# Altium PCB JacdacBrainF4 41.PcbDoc (part 1 of 2)
Units mm, origin at the board's own origin, x right, y up, seen from the top; angles counter-clockwise.
Board outline 19 x 37.35 mm, 2 copper layers (Top Layer, Bottom Layer), stack 1.525 mm thick; 50 components, 34 nets, 190 pads, 37 vias.
Unrouted connection lines stored in the file: 48.
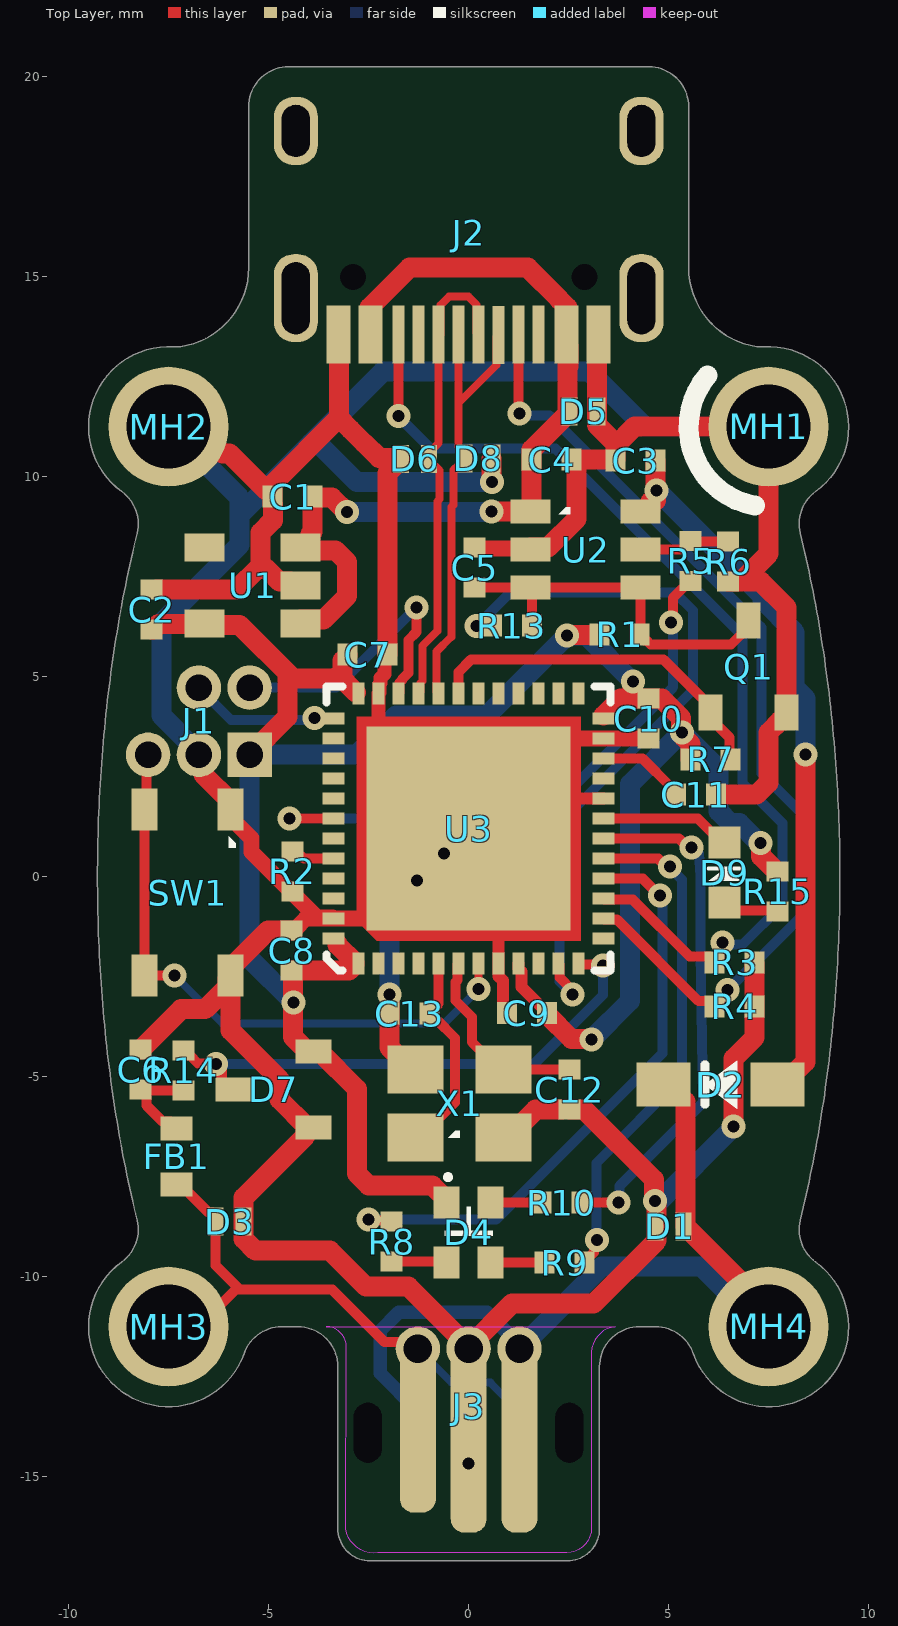
[diagram p0: Top Layer view]
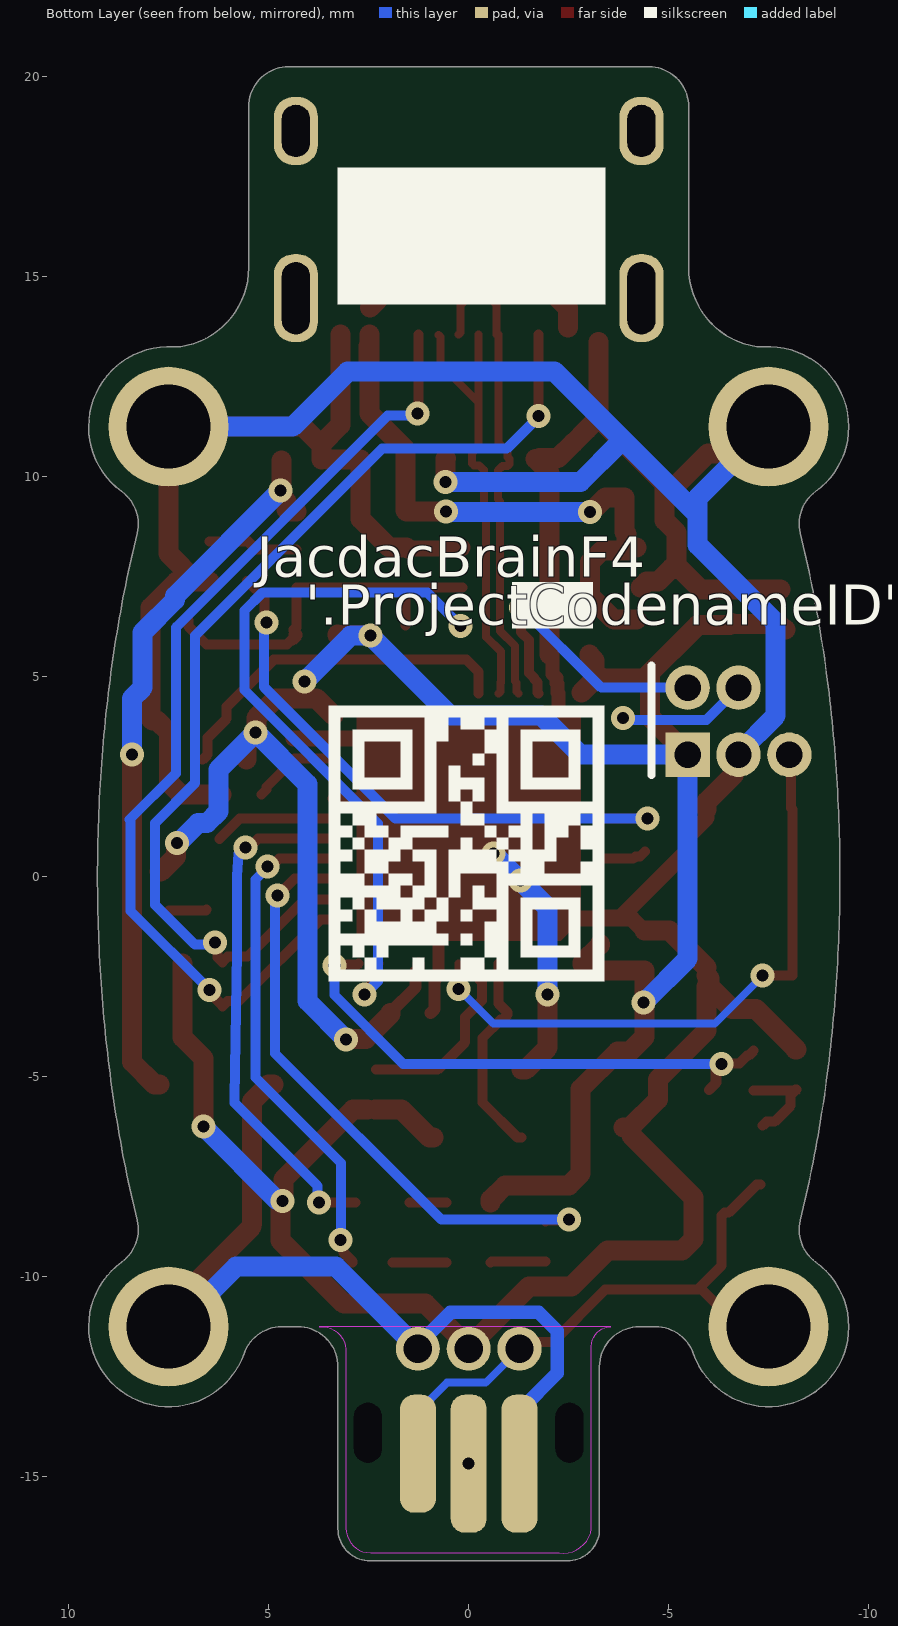
[diagram p1: Bottom Layer view, seen from below]

## Layer stack, top to bottom
Top Solder: solder mask 0.0102, Solder Resist, Dk 3.5
Top Layer: signal copper 0.0356
Dielectric 1: core 1.454, FR-4, Dk 4.2
Bottom Layer: signal copper 0.0356
Bottom Solder: solder mask 0.0102, Solder Resist, Dk 3.5

## Board outline
-9.493,-11.083 -9.493,-11.082 cw(c-7.5,-11.25) -8.675,-9.631 ccw(c-9.262,-8.822) -8.291,-8.584 -8.329,-8.425 -8.367,-8.265 -8.404,-8.104 -8.44,-7.942 -8.476,-7.78 -8.511,-7.617 -8.545,-7.453 -8.578,-7.289 -8.611,-7.124 -8.643,-6.959 -8.674,-6.793 -8.704,-6.626 -8.734,-6.459 -8.763,-6.291 -8.791,-6.122 -8.818,-5.953 -8.845,-5.784 -8.871,-5.614 -8.896,-5.444 -8.92,-5.273 -8.944,-5.101 -8.966,-4.929 -8.988,-4.757 -9.009,-4.585 -9.03,-4.411 -9.049,-4.238 -9.068,-4.064 -9.086,-3.89 -9.103,-3.716 -9.12,-3.541 -9.136,-3.366 -9.15,-3.19 -9.164,-3.014 -9.178,-2.839 -9.19,-2.662 -9.202,-2.486 -9.213,-2.309 -9.223,-2.132 -9.232,-1.955 -9.24,-1.778 -9.248,-1.601 -9.255,-1.423 -9.261,-1.246 -9.266,-1.068 -9.271,-0.89 -9.274,-0.712 -9.277,-0.534 -9.279,-0.356 -9.28,-0.178 -9.281,0 -9.28,0.178 -9.279,0.356 -9.277,0.534 -9.274,0.712 -9.271,0.89 -9.266,1.068 -9.261,1.246 -9.255,1.423 -9.248,1.601 -9.24,1.778 -9.232,1.955 -9.223,2.132 -9.213,2.309 -9.202,2.486 -9.19,2.662 -9.178,2.839 -9.164,3.014 -9.15,3.19 -9.136,3.366 -9.12,3.541 -9.103,3.716 -9.086,3.89 -9.068,4.064 -9.049,4.238 -9.03,4.411 -9.009,4.585 -8.988,4.757 -8.966,4.929 -8.944,5.101 -8.92,5.273 -8.896,5.444 -8.871,5.614 -8.845,5.784 -8.818,5.953 -8.791,6.122 -8.763,6.291 -8.734,6.459 -8.704,6.626 -8.674,6.793 -8.643,6.959 -8.611,7.124 -8.578,7.289 -8.545,7.453 -8.511,7.617 -8.476,7.78 -8.44,7.942 -8.404,8.104 -8.367,8.265 -8.329,8.425 -8.291,8.584 ccw(c-9.262,8.822) -8.675,9.631 cw(c-7.5,11.25) -7.375,13.246 ccw(c-7.312,14.245) -7.204,13.25 ccw(c-7.5,15.228) -5.5,15.228 -5.5,19.25 cw(c-4.5,19.25) -4.5,20.25 4.5,20.25 cw(c4.5,19.25) 5.5,19.25 5.5,15.228 ccw(c7.5,15.228) 7.204,13.25 ccw(c7.312,14.244) 7.375,13.246 cw(c7.5,11.25) 8.675,9.631 ccw(c9.262,8.822) 8.291,8.584 8.329,8.425 8.367,8.265 8.404,8.104 8.44,7.942 8.476,7.78 8.511,7.617 8.545,7.453 8.578,7.289 8.611,7.124 8.643,6.959 8.674,6.793 8.704,6.626 8.734,6.459 8.763,6.291 8.791,6.122 8.818,5.953 8.845,5.784 8.871,5.614 8.896,5.444 8.92,5.273 8.944,5.101 8.966,4.929 8.988,4.757 9.009,4.585 9.03,4.411 9.049,4.238 9.068,4.064 9.086,3.89 9.103,3.716 9.12,3.541 9.135,3.366 9.15,3.19 9.164,3.014 9.178,2.839 9.19,2.662 9.202,2.486 9.213,2.309 9.223,2.132 9.232,1.955 9.24,1.778 9.248,1.601 9.255,1.423 9.261,1.246 9.266,1.068 9.271,0.89 9.274,0.712 9.277,0.534 9.279,0.356 9.28,0.178 9.281,0 9.28,-0.178 9.279,-0.356 9.277,-0.534 9.274,-0.712 9.271,-0.89 9.266,-1.068 9.261,-1.246 9.255,-1.423 9.248,-1.601 9.24,-1.778 9.232,-1.955 9.223,-2.132 9.213,-2.309 9.202,-2.486 9.19,-2.662 9.178,-2.839 9.164,-3.014 9.15,-3.19 9.135,-3.366 9.12,-3.541 9.103,-3.716 9.086,-3.89 9.068,-4.064 9.049,-4.238 9.03,-4.411 9.009,-4.585 8.988,-4.757 8.966,-4.929 8.944,-5.101 8.92,-5.273 8.896,-5.444 8.871,-5.614 8.845,-5.784 8.818,-5.953 8.791,-6.122 8.763,-6.291 8.734,-6.459 8.704,-6.626 8.674,-6.793 8.643,-6.959 8.611,-7.124 8.578,-7.289 8.545,-7.453 8.511,-7.617 8.476,-7.78 8.44,-7.942 8.404,-8.104 8.367,-8.265 8.329,-8.425 8.291,-8.584 ccw(c9.262,-8.822) 8.675,-9.631 cw(c7.5,-11.25) 9.491,-11.064 cw(c7.5,-11.25) 5.614,-11.917 ccw(c4.672,-12.25) 4.672,-11.25 4.27,-11.25 ccw(c4.27,-12.25) 3.27,-12.25 3.27,-16.301 cw(c2.471,-16.301) 2.471,-17.1 -2.471,-17.1 cw(c-2.471,-16.301) -3.27,-16.301 -3.27,-12.25 ccw(c-4.27,-12.25) -4.27,-11.25 -4.672,-11.25 ccw(c-4.672,-12.25) -5.614,-11.917 cw(c-7.5,-11.25)

## Design rules (kind name [scope] priority, off if disabled: settings)
AssemblyTestPointUsage [All] p1: valid=2
BoardOutlineClearance [All] p1: gap=0.3 ignorepadtopadclearanceinfootprint=FALSE except(0: Arc-SplitContinuation Track-SplitContinuation SMDPad-SplitContinuation THPad-SplitContinuation Via-SplitContinuation Fill-SplitContinuation Poly-SplitContinuation Region-OutlineEdge Region-SplitContinuation Text-OutlineEdge Text-SplitContinuation; 0.25: THPad-OutlineEdge Poly-OutlineEdge)
Clearance [All] p1: gap=0.125 ignorepadtopadclearanceinfootprint=FALSE except(0: Arc-Hole Track-Hole SMDPad-Hole THPad-Hole Via-Hole Fill-Hole Poly-Hole Region-Hole Text-Hole)
ComponentClearance SpecialComponentClearance [InComponent('MH1') or InComponent('MH2')  or InComponent('MH3')  or InComponent('MH4') vs InComponent('J3') or InComponent('J4')  or InComponent('J6')  or InComponent('J7') or InComponent('J2') or InComponent('MH2') or InComponent('J1')] p1: gap=0 collisioncheckmode=3 verticalgap=0 showdistances=FALSE
ComponentClearance [All] p2: gap=0.2 collisioncheckmode=3 verticalgap=0.2 showdistances=FALSE
DiffPairsRouting [All] p1: maxlimit=2 minlimit=0.15 mostfreqgap=0.15 toplayer_minwidth=0.15 toplayer_maxwidth=2 toplayer_prefwidth=0.15 bottomlayer_minwidth=0.15 bottomlayer_maxwidth=2 bottomlayer_prefwidth=0.15 substack1={CB9D278B-8BF5-444A-AAF4-837A2A9DF42D} toplayer_{cb9d278b-8bf5-444a-aaf4-837a2a9df42d}_minwidth=0.381 toplayer_{cb9d278b-8bf5-444a-aaf4-837a2a9df42d}_maxwidth=0.381 toplayer_{cb9d278b-8bf5-444a-aaf4-837a2a9df42d}_prefwidth=0.381 bottomlayer_{cb9d278b-8bf5-444a-aaf4-837a2a9df42d}_minwidth=0.381 bottomlayer_{cb9d278b-8bf5-444a-aaf4-837a2a9df42d}_maxwidth=0.381 bottomlayer_{cb9d278b-8bf5-444a-aaf4-837a2a9df42d}_prefwidth=0.381 substack2={826B8647-A721-4255-895A-19F9591B9CD1} toplayer_{826b8647-a721-4255-895a-19f9591b9cd1}_minwidth=0.381 toplayer_{826b8647-a721-4255-895a-19f9591b9cd1}_maxwidth=0.381 toplayer_{826b8647-a721-4255-895a-19f9591b9cd1}_prefwidth=0.381 bottomlayer_{826b8647-a721-4255-895a-19f9591b9cd1}_minwidth=0.381 bottomlayer_{826b8647-a721-4255-895a-19f9591b9cd1}_maxwidth=0.381 bottomlayer_{826b8647-a721-4255-895a-19f9591b9cd1}_prefwidth=0.381 substack3={E64FCAF4-1BC8-437D-B1E0-0E5F2DC0F59E} toplayer_{e64fcaf4-1bc8-437d-b1e0-0e5f2dc0f59e}_minwidth=0.381 toplayer_{e64fcaf4-1bc8-437d-b1e0-0e5f2dc0f59e}_maxwidth=0.381 toplayer_{e64fcaf4-1bc8-437d-b1e0-0e5f2dc0f59e}_prefwidth=0.381 bottomlayer_{e64fcaf4-1bc8-437d-b1e0-0e5f2dc0f59e}_minwidth=0.381 bottomlayer_{e64fcaf4-1bc8-437d-b1e0-0e5f2dc0f59e}_maxwidth=0.381 bottomlayer_{e64fcaf4-1bc8-437d-b1e0-0e5f2dc0f59e}_prefwidth=0.381 substack4={E61CE66C-507C-4E1E-8E83-C905434AFC1C} toplayer_{e61ce66c-507c-4e1e-8e83-c905434afc1c}_minwidth=0.381 toplayer_{e61ce66c-507c-4e1e-8e83-c905434afc1c}_maxwidth=0.381 toplayer_{e61ce66c-507c-4e1e-8e83-c905434afc1c}_prefwidth=0.381 bottomlayer_{e61ce66c-507c-4e1e-8e83-c905434afc1c}_minwidth=0.381 bottomlayer_{e61ce66c-507c-4e1e-8e83-c905434afc1c}_maxwidth=0.381 bottomlayer_{e61ce66c-507c-4e1e-8e83-c905434afc1c}_prefwidth=0.381 maxuncoupledlength=25
FabricationTestPointUsage [All] p1: valid=2 allowmultiple=FALSE
HoleSize [All] p1: absolutevalues=TRUE maxlimit=2.54 minlimit=0.2 maxpercent=80.000 minpercent=20.000
MinimumSolderMaskSliver [All] p1: minsoldermaskwidth=0.005
PlaneClearance [All] p1: clearance=0.3
PlaneConnect [All] p1: planeconnectstyle=Relief reliefexpansion=0.5 reliefentries=4 reliefconductorwidth=0.2 reliefairgap=0.3
PolygonConnect "PolygonConnect GND" [isVIA] p1: connectstyle=Relief reliefconductorwidth=0.2 reliefentries=4 polygonreliefangle="90 Angle" airgapwidth=0.2
PolygonConnect [All] p2: connectstyle=Relief reliefconductorwidth=0.2 reliefentries=4 polygonreliefangle="90 Angle" airgapwidth=0.2
RoutingVias [All] p1: holewidth=0.3 width=0.6 viastyle="Through Hole" minholewidth=0.3 minwidth=0.6 maxholewidth=0.3 maxwidth=0.8
SilkToSilkClearance [All] p1: silktosilkclearance=0.001
SilkToSolderMaskClearance [IsPad] p1: minsilkscreentomaskgap=0.05 clearancetoexposedcopper=TRUE
SolderMaskExpansion [All] p1: expansion=0.075 istentingtop=FALSE
Width [All] p1: maxlimit=2 minlimit=0.15 preferedwidth=0.15 substack1={CB9D278B-8BF5-444A-AAF4-837A2A9DF42D} substack2={826B8647-A721-4255-895A-19F9591B9CD1} substack3={E64FCAF4-1BC8-437D-B1E0-0E5F2DC0F59E} substack4={E61CE66C-507C-4E1E-8E83-C905434AFC1C} minimp=50.000000 maximp=50.000000 favimp=50.000000
20 further rules are at their usual default settings.

## Classes and differential pairs
differential pair USB: +USB_P -USB_N

## Components (designator, comment, footprint, x,y, rotation, side; value= is the part's Value field where it differs from the comment)
C1 "CL05A105KP5NNNC" "C0402_0.55MM - without outline" -4.4,9.5 r0 top
C2 "CL05A105KP5NNNC" "C0402_0.55MM - without outline" -7.925,6.675 r270 top
C3 "CL05A475MP5NRNC" "R0402 - Without outline" 4.175,10.4 r0 top
C4 "CL05A475MP5NRNC" "R0402 - Without outline" 2.075,10.425 r180 top
C5 "CL05A475MP5NRNC" "R0402 - Without outline" 0.15,7.725 r270 top
C6 "CL05C330JB51PNC" "C0402_0.55MM - without outline" -8.2,-4.825 r270 top
C7 "CL05A105KP5NNNC" "C0402_0.55MM - without outline" -2.525,5.55 r180 top
C8 "CL05A105KP5NNNC" "C0402_0.55MM - without outline" -4.425,-1.85 r270 top
C9 "CL05A105KP5NNNC" "C0402_0.55MM - without outline" 1.453,-3.412 r0 top
C10 "CL05A105KP5NNNC" "C0402_0.55MM - without outline" 4.5,3.95 r90 top
C11 "CL05A475MP5NRNC" "R0402 - Without outline" 5.681,2.054 r180 top
C12 "CL05C120JB5NNNC" "C0402_0.55MM - without outline" 2.525,-5.325 r90 top
C13 "CL05C120JB5NNNC" "C0402_0.55MM - without outline" -1.475,-3.425 r0 top
D1 "RCLAMP0521P-N" "TVS 0402 - L" 5.025,-8.75 r180 top
D2 "RB161MM-20TR" SOD-123F 6.3,-5.2 r0 top
D2 "MBR120VLSFT3G" MBR120VLSFT3G 6.3,-5.2 r0 top
D3 "RCLAMP0521P-N" "TVS 0402 - L" -5.975,-8.625 r0 top
D4 "TZ-P4-1615RGBTCA1-0.55T" TZ-P4-1615RGBTCA1-0.55T 0,-8.9 r270 top
D5 "RCLAMP0521P-N" "TVS 0402 - L" 2.875,11.625 r0 top
D6 "RCLAMP0521P-N" "TVS 0402 - L" -1.347,10.447 r180 top
D7 "BAT54S" "NXP-BAT54S-TO-236AB - without outline" -4.875,-5.325 r180 top
D8 "RCLAMP0521P-N" "TVS 0402 - L" 0.243,10.462 r0 top
D9 "Everlight Elec'''" "0603 Green" 6.4,0.1 r270 top
FB1 "TDK MPZ1608S102ATA00" "TDK MPZ1608 0.8mm - without outline" -7.3,-7 r90 top
J1 "Hack Connect Mini 1.27 mm pitch 2-row" HACK_CONNECT_MINI_5_X_1_27 -5.475,3.05 r90 top
J2 "TYPE-C-31-M-12" TYPE-C-31-M-12 0,13.55 r180 top
J3 "3 pin jacdac edge connector" JACDAC_EDGE_CONNECTOR_0.2mm_T&G 0,-11.25 r180 top
MH1 "MH_5.0MMK_3.0MMC_2.1MMD_PTH" MH_5.0MMK_3.0MMC_2.1MMD_PTH 7.5,11.25 r0 top
MH2 "MH_5.0MMK_3.0MMC_2.1MMD_PTH" MH_5.0MMK_3.0MMC_2.1MMD_PTH -7.5,11.25 r180 top
MH3 "MH_5.0MMK_3.0MMC_2.1MMD_PTH" MH_5.0MMK_3.0MMC_2.1MMD_PTH -7.5,-11.25 r90 top
MH4 "MH_5.0MMK_3.0MMC_2.1MMD_PTH" MH_5.0MMK_3.0MMC_2.1MMD_PTH 7.5,-11.25 r0 top
Q1 "2N7002K-T1-GE3" "SOT-23-3 (TO-236)" 7,5.25 r90 top
R1 "RC0402FR-07330KL" "R0402 - Without outline" 3.775,6.05 r0 top
R2 "RC0402FR-07100KL" "R0402 - Without outline" -4.408,0.131 r90 top
R3 "RC0402JR-075K1L" "R0402 - Without outline" 6.65,-2.14 r0 top
R4 "RC0402JR-075K1L" "R0402 - Without outline" 6.65,-3.25 r0 top
R5 "RT0402FRE0768KL" "R0402 - Without outline" 5.546,7.889 r90 top
R6 "RC0402FR-0752K3L" "R0402 - Without outline" 6.483,7.879 r90 top
R7 "" "R0402 - Without outline" 6.05,2.925 r0 top
R8 "RC0402FR-0730RL" "R0402 - Without outline" -1.925,-9.125 r90 top
R9 "RC0402FR-0730RL" "R0402 - Without outline" 2.4,-9.65 r0 top
R10 "RC0402FR-07150RL" "R0402 - Without outline" 2.325,-8.15 r0 top
R13 "RC0402FR-07150RL" "R0402 - Without outline" 1.08,6.275 r0 top
R14 "RC0402FR-07220RL" "R0402 - Without outline" -7.125,-4.85 r270 top
R15 "RC0402FR-07150RL" "R0402 - Without outline" 7.725,-0.375 r90 top
SW1 "UK-B0267-SP25Y" USAKRO-UK-B0267-SP25Y -7.025,-0.4 r270 top
U1 "LDO 3.3V/300 mA" "ON_SEMI-SOT23-5 - without outline" -5.4,7.275 r180 top
U2 "TPS2553DBVR" "TI-TPS2553 - WITHOUT_OUTLINE" 2.925,8.175 r0 top
U3 "ST STM32F411CEU6" "ST UFQFPN48 SEH" 0,1.2 r90 top
X1 "CF4024M00012T8188046" "xtal 3.2x2.5" -0.225,-5.675 r0 top

## Footprints (in the part's own frame and the unit in brackets; to place one, negate y for a bottom-side part, rotate by r counter-clockwise, add the part's x,y. Pads: shape width x height; smd on the part's side, far side on the other; paste and mask are expansions set on the pad)
"0603 Green" [mm]
  rect 0.8x0.8 smd paste-0.05: 1(-0.75,0) 2(0.75,0)
  silkscreen extent -0.1,-0.4 0.2,0.4, body extent -0.79,-0.4 0.81,0.4, height 0.4
"C0402_0.55MM - without outline" [mm]
  rect 0.5x0.55 smd: 1(-0.5,0) 2(0.5,0)
  body extent -0.5,-0.25 0.5,0.25, height 0.55
HACK_CONNECT_MINI_5_X_1_27 [mm]
  rect 1.11x1.11 hole 0.66: 1(0,0)
  round 1.11 hole 0.66: 2(1.676,0) 3(0,1.27) 4(1.676,1.27) 5(0,2.54)
JACDAC_EDGE_CONNECTOR_0.2mm_T&G [mm] "JacDac 3 pin connector with traces for 0.2mm T&G"
  rrect78% 0.9x2.95 smd far side paste-1 mask+0: 1(-1.27,3.175)
  rrect78% 0.9x4.3 smd paste-1 mask+0: 1(1.27,2.5)
  round 1.11 / inner round 0.71 / far side round 1.1 hole 0.71 paste-0.254 mask+0: 1(1.27,0.55) 2(0,0.55) 3(-1.27,0.55)
  rrect78% 0.9x3.45 smd far side paste-1 mask+0: 2(0,3.425) 3(1.27,3.425)
  rrect78% 0.9x4.8 smd paste-1 mask+0: 2(0,2.75) 3(-1.27,2.75)
  round 0 hole 0.7 slot 1.5 at 90 deg unplated: ""(-2.52,2.65) ""(2.52,2.65)
  Top Layer keep-out region: -3.663,0 -3.413,0.079 -3.213,0.248 -3.092,0.48 -3.07,0.741 -3.07,0.741 -3.07,5.033 -2.987,5.341 -2.761,5.567 -2.453,5.65 -2.453,5.65 2.27,5.65 2.545,5.635 2.794,5.516 2.978,5.31 3.07,5.05 3.07,5.05 3.061,0.495 3.098,0.306 3.206,0.145 3.366,0.038 3.556,0 3.556,0
  Top Layer keep-out region: -3.663,0 -3.413,0.079 -3.213,0.248 -3.092,0.48 -3.07,0.741 -3.07,0.741 -3.07,5.033 -2.987,5.341 -2.761,5.567 -2.453,5.65 -2.453,5.65 2.27,5.65 2.545,5.635 2.794,5.516 2.978,5.31 3.07,5.05 3.07,5.05 3.061,0.495 3.098,0.306 3.206,0.145 3.366,0.038 3.556,0 3.556,0
  Bottom Layer lines w0.2: 1.126,0.7 0.426,1.4 -0.54,1.4 -1.307,2.167 ; -1.067,2.153 -1.067,2.077 ; -1.126,0.85 -1.27,0.85
  Bottom Layer lines w0.34: 1.283,2.092 2.21,1.165 2.21,0.098 1.753,-0.359 -0.457,-0.359 -1.27,0.454
  Bottom Layer keep-out region: -3.731,0 -3.494,0.027 -3.285,0.142 -3.136,0.329 -3.07,0.559 -3.07,0.559 -3.07,5.033 -3.023,5.269 -2.889,5.469 -2.689,5.603 -2.453,5.65 -2.453,5.65 2.27,5.65 2.545,5.635 2.794,5.516 2.978,5.31 3.07,5.05 3.07,5.05 3.07,0.487 3.107,0.301 3.213,0.143 3.371,0.037 3.557,0 3.557,0
MBR120VLSFT3G [mm] "SODFL, 2-Leads, Body 1.65x3.60mm, IPC Medium Density"
  rect 1.35x1.1 smd: 1(-1.425,0) 2(1.425,0)
  silkscreen extent -0.38,-0.6 0.42,0.6, body extent -1.73,-0.82 1.72,0.82, height 0.95
MH_5.0MMK_3.0MMC_2.1MMD_PTH [mm] "Mounting Hole 5.0mm clearance, 3.1 annualar ring and 2.1mm PTH"
  round 3 hole 2.1 mask+0.05: 1(0,0)
"NXP-BAT54S-TO-236AB - without outline" [mm] "SOT23, 3-Leads, Body 2.90x2.30mm, Pitch 0.95mm, IPC Medium Density"
  rect 0.9x0.6 smd: 1(-1,0.95) 2(-1,-0.95) 3(1,0)
  body extent -1.32,-1.5 1.32,1.5, height 1.12
"ON_SEMI-SOT23-5 - without outline" [mm]
  rect 1x0.7 smd: 1(-1.2,0.95) 2(-1.2,0) 3(-1.2,-0.95) 4(1.2,-0.95) 5(1.2,0.95)
  body extent -1.5,-1.57 1.5,1.58, height 1.1
"R0402 - Without outline" [mm]
  rect 0.5x0.55 smd: 1(-0.5,0) 2(0.5,0)
  body extent -0.5,-0.25 0.5,0.25, height 0.35
SOD-123F [mm] "SODFL, 2-Leads, Body 1.65x3.60mm, IPC Medium Density"
  rect 1.35x1.1 smd: 1(-1.425,0) 2(1.425,0)
  silkscreen extent -0.4,-0.6 0.4,0.6, body extent -1.73,-0.82 1.72,0.82, height 0.95
"SOT-23-3 (TO-236)" [mm] "SOT23, 3-Leads, Body 2.90x2.30mm, Pitch 0.95mm, IPC Medium Density"
  rect 0.9x0.6 smd: 1(-1.15,0.95) 2(-1.15,-0.95) 3(1.15,0)
  body extent -1.32,-1.5 1.32,1.5, height 1.12
"ST UFQFPN48 SEH" [mm]
  rect 0.55x0.3 smd mask+0.05: 1(-3.375,2.75) 2(-3.375,2.25) 3(-3.375,1.75) 4(-3.375,1.25) 5(-3.375,0.75) 6(-3.375,0.25) 7(-3.375,-0.25) 8(-3.375,-0.75) 9(-3.375,-1.25) 10(-3.375,-1.75) 11(-3.375,-2.25) 12(-3.375,-2.75) 25(3.375,-2.75) 26(3.375,-2.25) 27(3.375,-1.75) 28(3.375,-1.25) 29(3.375,-0.75) 30(3.375,-0.25) 31(3.375,0.25) 32(3.375,0.75) 33(3.375,1.25) 34(3.375,1.75) 35(3.375,2.25) 36(3.375,2.75)
  rect 0.3x0.55 smd mask+0.05: 13(-2.75,-3.375) 14(-2.25,-3.375) 15(-1.75,-3.375) 16(-1.25,-3.375) 17(-0.75,-3.375) 18(-0.25,-3.375) 19(0.25,-3.375) 20(0.75,-3.375) 21(1.25,-3.375) 22(1.75,-3.375) 23(2.25,-3.375) 24(2.75,-3.375) 37(2.75,3.375) 38(2.25,3.375) 39(1.75,3.375) 40(1.25,3.375) 41(0.75,3.375) 42(0.25,3.375) 43(-0.25,3.375) 44(-0.75,3.375) 45(-1.25,3.375) 46(-1.75,3.375) 47(-2.25,3.375) 48(-2.75,3.375)
  rect 5.1x5.1 smd paste-3 mask+0: 49(0,0)
  Top Layer region: 2.8,-2.8 -2.8,-2.8 -2.8,2.3 -2.3,2.8 2.8,2.8
  silkscreen extent -3.55,-3.55 3.55,3.55, body extent -3.5,-3.5 3.5,3.5, height 0.53
"TDK MPZ1608 0.8mm - without outline" [mm]
  rect 0.6x0.8 smd: 1(-0.7,0) 2(0.7,0)
  body extent -0.8,-0.4 0.8,0.4, height 0.8
"TI-TPS2553 - WITHOUT_OUTLINE" [mm] "SOT23, 6-Leads, Body 2.90x2.80mm, Pitch 0.95mm, IPC Medium Density"
  rect 1x0.6 smd: 1(-1.375,0.95) 2(-1.375,0) 3(-1.375,-0.95) 4(1.375,-0.95) 5(1.375,0) 6(1.375,0.95)
  silkscreen extent -0.67,0.89 -0.38,1.06, body extent -1.52,-1.52 1.53,1.53, height 1.1
"TVS 0402 - L" [mm] "TVS 0402 RoHS"
  rect 0.4x0.7 smd paste-0.038 mask+0.05: 1(-0.35,0) 2(0.35,0)
  body extent -0.5,-0.3 0.5,0.3, height 0.5
TYPE-C-31-M-12 [mm] "USB - Type C Female 16 8.94*7.3mm USB Connectors RoHS"
  rrect90% 1.1x2.2 hole 0.7 slot 1.8 at 90 deg: 1(-4.32,-0.915) 4(4.32,-0.915)
  rrect90% 0x0 hole 0.65 unplated: 1(-2.89,-1.445)
  round 0 hole 0.65 unplated: 1(2.89,-1.445)
  rrect90% 1.1x1.7 hole 0.7 slot 1.3 at 90 deg: 2(-4.32,-5.095) 3(4.32,-5.095)
  rect 0.3x1.45 smd paste-0.254 mask+0.05: A1(-3.4,0)
  rect 0.3x1.45 smd mask+0.05: A4(-2.6,0) A5(-1.25,0) A6(-0.25,0) A7(0.25,0) A8(1.25,0) A9(2.6,0) A12(3.4,0) B1(3.1,0) B4(2.3,0) B5(1.75,0) B6(0.75,0) B7(-0.75,0.006) B8(-1.75,0) B9(-2.3,0) B12(-3.1,0)
  body extent -4.47,-7.7 4.47,0.21, height 3.31
TZ-P4-1615RGBTCA1-0.55T [mm] "1615 Light Emitting Diodes (LED) RoHS"
  rect 0.8x0.65 smd mask+0.05: 1(-0.75,-0.55) 2(-0.75,0.55) 3(0.75,0.55) 4(0.75,-0.55)
  silkscreen extent -1.44,-0.6 0.07,0.6, body extent -0.8,-0.75 0.8,0.75, height 0.55
USAKRO-UK-B0267-SP25Y [mm] "4.20mm x 3.20mm"
  rect 1.05x0.65 smd: 1(-2.075,1.075) 2(2.075,1.075) 3(-2.075,-1.075) 4(2.075,-1.075)
  silkscreen extent -1.41,1.02 -1.12,1.2, body extent -2.29,-1.6 2.29,1.6, height 2.5
"xtal 3.2x2.5" [mm] "Crystal SMD 3.2mm x 2.5mm"
  rect 1.4x1.2 smd: 1(-1.1,-0.85) 2(1.1,-0.85) 3(1.1,0.85) 4(-1.1,0.85)
  silkscreen extent -0.29,-0.85 0,-0.67, body extent -1.6,-1.25 1.6,1.25, height 0.7

## Part data
C1 C2 C7 C8 C9 C10: "CAP CER 1UF 10V X5R 0402", Capacitance=1µF, Case Code (Imperial)=0402, Case Code (Metric)=1005, Dielectric=X5R, Manufacturer=Samsung, Max Operating Temperature=85°C, Min Operating Temperature=-55°C, Package Quantity=1, Supplier Part Number 1=1276-1076-1-ND, Tolerance=10%, Voltage Rating=10V, Case/Package=0402, Category=Capacitors, Checked=?, ComponentLink1Description="Online datasheet", ComponentLink1URL=https://datasheet.ciiva.com/15195/getdatasheetpartid-358390-15195630.pdf, Contact Plating=Tin, Created=DG, Depth=0.5mm, Height=0.5mm, Length=1mm, Manufacturer Part Number=CL05A105KP5NNNC, Material=Ceramic, Mount="Surface Mount", Packaging="Tape and Reel", Pricing 1="1=0.10000, 10=0.03900, 50=0.02100, 100=0.01720, 500=0.01228, 1000=0.00965, 2500=0.00877, 5000=0.00807 (USD)", Pricing 2="1=0.10000, 10=0.04200, 100=0.01800, 500=0.01300, 1000=0.01000, 2500=0.00900 (USD)", Pricing 3="10=0.02450, 100=0.02000, 500=0.01310, 2500=0.00920, 5000=0.00810, 10000=0.00640, 50000=0.00490 (GBP)", Radiation Hardening=No, RoHS=Yes, Stock 1=5705569, Stock 2=928941, Stock 3=53670, Supplier 1=Digi-Key, Supplier 2=Mouser, Supplier 3=Farnell, Supplier Part Number 2=187-CL05A105KP5NNNC, Supplier Part Number 3=3013329, Thickness=0.022inch, Width=0.02inch
C3 C4 C5 C11: "CAP CER 4.7UF 10V X5R 0402", Capacitance=4.7uF, Case Code (Imperial)=0402, Case Code (Metric)=1005, Dielectric=X5R, Manufacturer=Samsung, Max Operating Temperature=85°C, Min Operating Temperature=-55°C, Package Quantity=10000, Supplier Part Number 1=1276-1482-2-ND, Tolerance=20%, Voltage Rating=10V, Case/Package=0402, Category="Ceramic Capacitors", Checked By=?, ComponentLink1Description="Online datasheet", ComponentLink1URL=https://datasheet.ciiva.com/25786/cl05a475mp5nrnc-25786963.pdf, Created By="D. Gakure", Lead Free="Lead Free", Length=0.039inch, Manufacturer Part Number=CL05A475MP5NRNC, Mount="Surface Mount", Packaging="Tape and Reel", Pricing 1="10000=0.01405, 20000=0.01338 (USD)", Pricing 2="1=0.23500, 500=0.03970, 1500=0.02900, 2500=0.02500, 5000=0.02050 (USD)", RoHS=Yes, RoHS Compliant=Yes, Series=CL, Stock 1=840000, Stock 2=2004, Supplier 1=Digi-Key, Supplier 2="Future Electronics", Supplier Part Number 2=2103694, Thickness=0.022inch, Width=0.02inch
C6: "CAP CER 33PF 50V NP0 0402", Capacitance=33pF, Case Code (Imperial)=0402, Case Code (Metric)=1005, Manufacturer=Samsung, Max Operating Temperature=125°C, Min Operating Temperature=-55°C, Ratings=AEC-Q200, Supplier Part Number 1=1276-6515-1-ND, Tolerance=5%, Voltage Rating=50V, Case/Package=0402, Category=Capacitors, Checked=?, ComponentLink1Description="Samsung datasheet online", ComponentLink1URL=http://www.samsungsem.com/kr/support/library/product-catalog/mlcc.jsp, Created=DG, Lead Free="Lead Free", Length=0.039inch, Manufacturer Part Number=CL05C330JB51PNC, Mount="Surface Mount", Packaging="Tape and Reel", Pricing 1="1=0.10000, 10=0.07500, 50=0.04060, 100=0.03320, 500=0.02374, 1000=0.01865, 2500=0.01696, 5000=0.01560 (USD)", Pricing 2="1=0.11000, 10=0.08200, 100=0.03600, 500=0.02600, 1000=0.02000, 2500=0.01800 (USD)", Pricing 3="10000=0.00780 (USD)", RoHS=Yes, Stock 1=250654, Stock 2=97900, Stock 3=100000, Supplier 1=Digi-Key, Supplier 2=Mouser, Supplier 3="Future Electronics", Supplier Part Number 2=187-CL05C330JB51PNC, Supplier Part Number 3=6022520, Thickness=0.022inch, Width=0.02inch
C12 C13: "CAP CER 12PF 50V C0G/NP0 0402", Capacitance=12pF, Case Code (Imperial)=0402, Case Code (Metric)=1005, Dielectric=C0G, Manufacturer=Samsung, Max Operating Temperature=125°C, Min Operating Temperature=-55°C, Package Quantity=1, Supplier Part Number 1=1276-1178-1-ND, Temperature Coefficient=300ppm/°C, Tolerance=5%, Voltage=50V, Case/Package=0402, Category="Ceramic Capacitors", ComponentLink1Description="Online datasheet", ComponentLink1URL=https://datasheet.ciiva.com/25806/cl05c120jb5nnnc-25806484.pdf, Construction=Flat, Contact Plating=Tin, Depth=0.5mm, Height=0.5mm, Lead Free="Lead Free", Length=1mm, Manufacturer Part Number=CL05C120JB5NNNC, Material=Ceramic, Mount="Surface Mount", Packaging="Tape and Reel", Pricing 1="1=0.10000, 10=0.02100, 50=0.01160, 100=0.00950, 500=0.00676, 1000=0.00531, 2500=0.00483, 5000=0.00444 (USD)", Pricing 2="1=0.10000, 10=0.01200, 50=0.01200, 100=0.01000, 1000=0.00600, 10000=0.00300 (USD)", Radiation Hardening=No, RoHS=Yes, RoHS Compliant=Yes, Series=CL, Stock 1=674678, Supplier 1=Digi-Key, Supplier 2=Mouser, Supplier Part Number 2=187-CL05C120JB5NNNC, Thickness=0.022inch, Voltage Rating=50V, Voltage Rating (DC)=50V, Width=0.02inch
D1 D3 D5 D6 D8: "Bidirectional 5V (Max) 6V 16V 3.5A (8/20us) 0402 TVS RoHS", Manufacturer="Born Semiconductor", Package=0402, Supplier1 Part Number=C316043, Checked By=?, ComponentLink1Description="Online datasheet", ComponentLink1URL=https://datasheet.lcsc.com/szlcsc/Bourne-Semicon-Shenzhen-RCLAMP0521P-N_C316043.pdf, Created By="D Gakure", Manufacturer Part Number=RCLAMP0521P-N, Supplier1=LCSC
D2: "ROHM - RB161MM-20TR - Schottky-Gleichrichterdiode, 20 V, 1 A, Einfach, SOD-123FL, 2 Pin(s), 350 mV"
D2: "DIODE SCHOTTKY 20V 1A SOD123FL", Average Rectified Current=1A, Forward Voltage=340mV, Manufacturer="ON Semiconductor", Max Forward Surge Current (Ifsm)=45A, Max Operating Temperature=125°C, Max Repetitive Reverse Voltage (Vrrm)=20V, Max Reverse Leakage Current=600uA, Min Operating Temperature=-65°C, Package Quantity=10000, Supplier Part Number 1=MBR120VLSFT3GOSCT-ND, Category="Schottky Diodes", ComponentLink4Description="On Semi datasheet online", ComponentLink4URL=https://datasheet.ciiva.com/6380/mbr120vlsft1-d-6380910.pdf, Current Rating=1A, Element Configuration=Single, Forward Current=1A, Halogen Free="Halogen Free", Lead Free="Lead Free", Manufacturer Part Number=MBR120VLSFT3G, Max Reverse Voltage (DC)=20V, Max Surge Current=45A, Number of Pins=2, Output Current=1A, Packaging="Tape and Reel", Peak Non-Repetitive Surge Current=45A, Peak Reverse Current=600uA, Polarity=Standard, Pricing 1="1=0.39000, 10=0.28600, 100=0.19920, 500=0.12616, 1000=0.10292, 2000=0.09960, 5000=0.09628 (USD)", Radiation Hardening=No, REACH SVHC="No SVHC", RoHS=Yes, Stock 1=32481, Supplier 1=Digi-Key, Supplier 2=Mouser, Supplier 3=RSComponents, Supplier Part Number 2=863-MBR120VLSFT3G, Supplier Part Number 3=1867479, Voltage Rating (DC)=20V
D4: "1615 Light Emitting Diodes (LED) RoHS", Manufacturer=TUOZHAN, Package=1615, Supplier 1 Part Number=C779813, Category=Optoelectronics, Checked By=?, ComponentLink1Description="Online datasheet", ComponentLink1URL=https://datasheet.lcsc.com/szlcsc/2009041238_TUOZHAN-TZ-P4-1615RGBTCA1-0-55T_C779813.pdf, Created By="D. Gakure", Manufacturer Part Number=TZ-P4-1615RGBTCA1-0.55T, Packaging="Tape & Reel (TR)", RoHS="RoHS Compliant", Size / Dimension=1.6x1.5mm, Supplier 1=LCSC
D7: "DIODE ARRAY SCHOTTKY 30V SOT23", Manufacturer=Nexperia, Manufacturer Part Number=BAT54S,235, Supplier Part Number 1=1727-1868-1-ND, Category="Rectifier Diodes", ComponentLink1Description="NXP datasheet online", ComponentLink1URL=https://assets.nexperia.com/documents/data-sheet/BAT54_SER.pdf, Pricing 1="1=0.13000, 10=0.11900, 100=0.05610, 500=0.03326, 1000=0.02185, 5000=0.02138 (USD)", RoHS=No, Stock 1=14011, Supplier 1=Digi-Key, Supplier 2=Mouser, Supplier 3=RSComponents, Supplier Part Number 2=771-BAT54S235, Supplier Part Number 3=1707990
D9: library part 19-217/GHC-YR1S2/3T, "LED GREEN DIFFUSED 0603 SMD", Case Code (Imperial)=0603, Color=Green, Manufacturer="Everlight Elec", Supplier 1 Part Number=C72043, Case/Package=0603, Colour=Green, ComponentLink1Description="Online datasheet", ComponentLink1URL=https://datasheet.lcsc.com/lcsc/1811101510_Everlight-Elec-19-217-GHC-YR1S2-3T_C72043.pdf, Manufacturer Part Number=19-217/GHC-YR1S2/3T, Mount="Surface Mount", Supplier 1=LCSC
FB1: "0603 1k@100MHz 0.8A chip", Case Code (Imperial)=0603, Case Code (Metric)=1608, Current Rating=800mA, DC Resistance (DCR)=300mR, Manufacturer=TDK, Manufacturer Part Number=MPZ1608S102ATA00, Package Quantity=4000, Supplier Part Number 1=445-8694-1-ND, Tolerance=25%, Case/Package=0603, ComponentLink2Description="datasheet online", ComponentLink2URL=https://www.mouser.co.uk/datasheet/2/400/eads_commercial_power_mpz1608_en-923650.pdf, ComponentLink3Description=datasheet, ComponentLink3URL="Y:\System\Altium\Libraries 2014\TDK\Datasheets\eads_commercial_power_mpz1608_en-923650.pdf", Core Material=Ferrite, Height=0.037inch, Impedance="1kR @ 100MHz", Length=0.063inch, Max DC Current=800mA, Mount="Surface Mount", Packaging="Tape and Reel", Pricing 1="1=0.1, 10=0.079, 25=0.0716, 50=0.0644, 100=0.0472, 250=0.03432, 500=0.03146, 1000=0.02717 (USD)", Stock 1=113542, Supplier 1=Digi-Key, Supplier 2=Mouser, Supplier Part Number 2=810-MPZ1608S102ATA00, Width=0.031inch
J1: library part HACK_CONNECT_MINI
J2: "USB - Type C Female 16 USB Connectors RoHS", Manufacturer="Korean Hroparts Elec", Supplier 1 Part Number=C165948, Category="USB Connectors", ComponentLink1Description="Online datasheet", ComponentLink1URL=https://datasheet.lcsc.com/szlcsc/1811131825_Korean-Hroparts-Elec-TYPE-C-31-M-12_C165948.pdf, Gender=Receptacle, Manufacturer Part Number=TYPE-C-31-M-12, Number of Positions=16, Orientation="Right Angle", RoHS=Yes, Supplier 1=LCSC
J3: library part "JACDAC edge connector", "3 pin jacdac edge connector 1.27mm pitch", Manufacturer Part Number=JACDAC_EDGE_CONNECTOR, Checked By=?, ComponentLink1Description="JACDAC PCB edge connector spec onlin", ComponentLink1URL=https://github.com/microsoft/jacdac-mdk/blob/main/connector/JACDAC_PCB_Edge_Connector_Drawing_JD-PEC-01_rev_01.pdf, ComponentLink2Description="Yuliang JACDAC cable connector drawing online", ComponentLink2URL=https://github.com/microsoft/jacdac-mdk/blob/main/connector/JACDAC-Connector-by-Yuliang-2020-11-28.pdf, Created By="D. Gakure", PCB Type="1.6mm FR4"
MH1 MH2 MH3 MH4: "Mounting Hole 5.0mm keepout, 3.0mm annualar ring and 2.1mm Drill PTH"
Q1: "Trans MOSFET N-CH Si 60V 0.3A 3-Pin SOT-23 T/R", Case/Package=SOT-23, Continuous Drain Current (ID)=300mA, Drain to Source Breakdown Voltage=60V, Drain to Source Resistance=2R, Gate to Source Voltage (Vgs)=20V, Input Capacitance=30pF, Manufacturer=Vishay, Max Operating Temperature=150°C, Max Power Dissipation=350mW, Min Operating Temperature=-55°C, Package Quantity=1, Supplier Part Number 1=2N7002K-T1-GE3CT-ND, Threshold Voltage=1V, Category=MOSFETs, ComponentLink1Description="Online datasheet", ComponentLink1URL=https://datasheet.ciiva.com/2957/2n7002k-2957216.pdf, Contact Plating=Tin,Matte, Drain to Source Voltage (Vdss)=60V, Element Configuration=Single, Height=1.02mm, Lead Free="Lead Free", Length=3.04mm, Manufacturer Part Number=2N7002K-T1-GE3, Mount="Surface Mount", Nominal Vgs=2V, Number of Channels=1, Number of Elements=1, Number of Pins=3, On-State Resistance=2R, Packaging="Tape and Reel", Power Dissipation=350mW, Pricing 1="1=0.27000, 10=0.21800, 25=0.18200, 100=0.11540, 500=0.07590, 1000=0.05161 (USD)", Pricing 2="100=0.11100 (USD)", Radiation Hardening=No, Rds On Max=2R, REACH SVHC=Unknown, RoHS=Yes, Stock 2=1, Supplier 1=Digi-Key, Supplier 2=RSComponents, Supplier Part Number 2=7879058P, Turn-Off Delay Time=35ns, Turn-On Delay Time=25ns, Voltage=60V, Weight=0.050717oz, Width=1.4mm
R1: "RES SMD 330K OHM 1% 1/16W 0402", Case Code (Imperial)=0402, Case Code (Metric)=1005, Manufacturer=Yageo, Max Operating Temperature=155°C, Max Power Dissipation=63mW, Min Operating Temperature=-55°C, Package Quantity=1, Resistance=330kR, Resistance Tolerance=1%, Resistor Type="Thick Film", Supplier Part Number 1=311-330KLRCT-ND, Temperature Coefficient=100ppm/°C, Voltage Rating=50V, Case/Package=0402, Category="Chip SMD Resistors", Checked By=?, ComponentLink1Description="Online datasheet", ComponentLink1URL=https://datasheet.ciiva.com/2518/pyu-r-int-thick-7-2518994.pdf?src-supplier=Digi-Key, Construction=Rectangular, Created By="D Gakure", Depth=0.5mm, Features="Moisture Resistant", Height=0.016inch, Lead Free="Lead Free", Length=1mm, Manufacturer Part Number=RC0402FR-07330KL, Military Standard=Not, Number of Terminations=2, Packaging="Tape and Reel", Power Rating=63mW, Pricing 1="1=0.10000, 10=0.01600, 100=0.00660, 1000=0.00299, 2500=0.00259, 5000=0.00214 (USD)", Pricing 2="1=0.10000, 10=0.01400, 50=0.01400, 100=0.00500, 1000=0.00300, 10000=0.00200 (USD)", Pricing 3="10=0.01210, 100=0.00460, 500=0.00410, 2500=0.00310, 5000=0.00280, 10000=0.00250, 50000=0.00180 (GBP)", REACH SVHC=Unknown, RoHS=Yes, RoHS Compliant=Yes, Series=RC, Size Code=0402, Stock 1=78809, Stock 2=218637, Stock 3=310234, Supplier 1=Digi-Key, Supplier 2=Mouser, Supplier 3=Farnell, Supplier Part Number 2=603-RC0402FR-07330KL, Supplier Part Number 3=9239537, Termination=SMD/SMT, Tolerance=1%, Width=0.02inch
R2: "RES SMD 100K OHM 1% 1/16W 0402", Case Code (Imperial)=0402, Case Code (Metric)=1005, Manufacturer=Yageo, Max Operating Temperature=155°C, Max Power Dissipation=63mW, Min Operating Temperature=-55°C, Package Quantity=1, Resistance=100kR, Resistor Type="Thick Film", Supplier Part Number 1=311-100KLRCT-ND, Temperature Coefficient=100ppm/°C, Tolerance=1%, Voltage Rating=50V, Case/Package=0402, Category=Resistors, Checked By=?, ComponentLink2Description="Online datasheet", ComponentLink2URL=https://datasheet.ciiva.com/2453/pyu-r-int-thick-7-2453361.pdf, Created By=DG, Depth=0.5mm, Features="Moisture Resistant", Height=0.016inch, Lead Free="Lead Free", Length=0.039inch, Manufacturer Part Number=RC0402FR-07100KL, Military Standard=Not, Number of Terminations=2, Packaging="Tape and Reel", Power Rating=63mW, Pricing 1="1=0.10000, 10=0.01400, 100=0.00580, 1000=0.00262, 2500=0.00228, 5000=0.00188 (USD)", Pricing 2="1=0.10000, 10=0.01200, 100=0.00400, 1000=0.00400, 2500=0.00400, 10000=0.00300 (USD)", Pricing 3="1=0.10200, 25=0.01220, 100=0.01200, 250=0.01020, 500=0.00890 (GBP)", REACH SVHC="No SVHC", RoHS=Yes, Stock 1=5819191, Stock 2=4458847, Stock 3=19392, Supplier 1=Digi-Key, Supplier 2=Mouser, Supplier 3=Farnell, Supplier Part Number 2=603-RC0402FR-07100KL, Supplier Part Number 3=2131798, Termination=SMD/SMT, Width=0.02inch, Working Voltage=50V
R3 R4: "RES SMD 5.1K OHM 5% 1/16W 0402", Case Code (Imperial)=0402, Case Code (Metric)=1005, Manufacturer=Yageo, Max Operating Temperature=155°C, Max Power Dissipation=63mW, Min Operating Temperature=-55°C, Power Rating=62.5mW, Resistance=5.1kR, Resistance Tolerance=5%, Resistor Type="Thick Film", Supplier Part Number 1=311-5.1KJRCT-ND, Temperature Coefficient=100ppm/°C, Voltage Rating=50V, Case/Package=0402, Category="Chip SMD Resistors", Checked By=?, ComponentLink2Description="Onnline datasheet", ComponentLink2URL=https://datasheet.ciiva.com/16740/pyu-rc0402-51-rohs-l-6-r-16740925.pdf, Construction=Rectangular, Created By="D. Gakure", Depth=0.5mm, Features="Moisture Resistant", Height=0.35mm, Lead Free="Lead Free", Length=1mm, Manufacturer Part Number=RC0402JR-075K1L, Military Standard=Not, Number of Terminations=2, Packaging="Tape and Reel", Pricing 1="1=0.10000, 10=0.01300, 100=0.00520, 1000=0.00233, 2500=0.00202, 5000=0.00167 (USD)", Pricing 2="1=0.10000, 25=0.01000, 100=0.00400, 250=0.00400, 500=0.00300, 1000=0.00300 (USD)", Pricing 3="1=0.10000, 10=0.01000, 50=0.01000, 100=0.00400, 1000=0.00300, 10000=0.00200 (USD)", Pricing 4="10=0.00910, 100=0.00390, 500=0.00320, 2500=0.00240, 5000=0.00210, 10000=0.00190, 50000=0.00150 (GBP)", Pricing 5="10000=0.00270 (GBP)", REACH SVHC="No SVHC", RoHS=Yes, RoHS Compliant=Yes, Series=RC, Size Code=0402, Stock 1=1270619, Stock 2=1265, Stock 3=100817, Stock 4=68890, Stock 5=1265, Supplier 1=Digi-Key, Supplier 2=Newark, Supplier 3=Mouser, Supplier 4=Farnell, Supplier 5=Farnell, Supplier Part Number 2=68R0016, Supplier Part Number 3=603-RC0402JR-075K1L, Supplier Part Number 4=3495714, Supplier Part Number 5=1799293, Termination=SMD/SMT, Tolerance=5%, Voltage Rating (DC)=50V, Weight=2.3E-05oz, Width=0.5mm
R5: "RES SMD 68K OHM 1% 1/16W 0402", Case Code (Imperial)=0402, Case Code (Metric)=1005, Manufacturer=Yageo, Max Operating Temperature=125°C, Max Power Dissipation=63mW, Min Operating Temperature=-55°C, Package Quantity=10000, Power Rating=62.5mW, Resistance=68kR, Resistor Type="Thin Film", Supplier Part Number 1=13-RT0402FRE0768KLCT-ND, Temperature Coefficient=50ppm/°C, Tolerance=1%, Voltage Rating=50V, Case/Package=0402, Category="Chip SMD Resistors", Checked By=?, ComponentLink1Description="Online datasheet", ComponentLink1URL=https://datasheet.ciiva.com/2561/pyu-rt-1-to-0-05-rohs-l-5-2561824.pdf?src-supplier=Digi-Key, Contact Plating=Tin,Matte, Created By="D. Gakure", Height=0.014inch, Lead Free="Lead Free", Length=0.039inch, Manufacturer Part Number=RT0402FRE0768KL, Number of Terminations=2, Packaging="Tape and Reel", Pricing 1="1=0.10000, 10=0.07000, 100=0.02830, 1000=0.01272, 2500=0.01104, 5000=0.00912 (USD)", Pricing 2="1=0.24000, 10=0.05600, 50=0.05600, 100=0.01900, 1000=0.01400, 10000=0.00800 (USD)", Radiation Hardening=No, RoHS=Yes, RoHS Compliant=Yes, Series=RT, Stock 1=19319, Stock 2=28756, Supplier 1=Digi-Key, Supplier 2=Mouser, Supplier Part Number 2=603-RT0402FRE0768KL, Termination=SMD/SMT, Voltage Rating (DC)=50V, Width=0.02inch
R6: "RES SMD 52.3K OHM 1% 1/16W 0402", Case Code (Imperial)=0402, Case Code (Metric)=1005, Manufacturer=Yageo, Max Operating Temperature=155°C, Max Power Dissipation=63mW, Min Operating Temperature=-55°C, Power Rating=62.5mW, Resistance=52.3kR, Resistor Type="Thick Film", Supplier Part Number 1=YAG3179CT-ND, Temperature Coefficient=100ppm/°C, Tolerance=1%, Voltage Rating=50V, Case/Package=0402, Category="Chip SMD Resistors", Checked By=?, ComponentLink1Description="Oline datasheet", ComponentLink1URL=https://datasheet.ciiva.com/16867/pyu-rc0402-51-rohs-l-6-16867930.pdf, Construction=Rectangular, Contact Plating=Tin,Matte, Created By="D. Gakure", Depth=0.5mm, Features="Moisture Resistant", Height=0.016inch, Lead Free="Lead Free", Length=1mm, Manufacturer Part Number=RC0402FR-0752K3L, Military Standard=Not, Number of Terminations=2, Packaging="Tape and Reel", Pricing 1="1=0.10000, 10=0.01600, 100=0.00640, 1000=0.00286, 2500=0.00248, 5000=0.00205 (USD)", Pricing 2="1=0.10000, 10=0.01200, 50=0.01200, 100=0.00400, 1000=0.00300, 10000=0.00300 (USD)", RoHS=Yes, RoHS Compliant=Yes, Series=RC, Size Code=0402, Stock 1=1178310, Stock 2=83620, Supplier 1=Digi-Key, Supplier 2=Mouser, Supplier Part Number 2=603-RC0402FR-0752K3L, Termination=SMD/SMT, Voltage Rating (DC)=50V, Weight=2.3E-05oz, Width=0.02inch
R7: library part RC0402FR-071ML, "RES SMD 1M OHM 1% 1/16W 0402", Case Code (Imperial)=0402, Case Code (Metric)=1005, Manufacturer=Yageo, Max Operating Temperature=155°C, Max Power Dissipation=63mW, Min Operating Temperature=-55°C, Resistance=1MR, Resistance Tolerance=1%, Resistor Type="Thick Film", Supplier Part Number 1=311-1.00MLRCT-ND, Temperature Coefficient=100ppm/°C, Voltage Rating=50V, Case/Package=0402, Category="Chip SMD Resistors", Checked By=?, ComponentLink1Description="Online datasheet", ComponentLink1URL=https://datasheet.ciiva.com/11808/0900766b80c66297-11808125.pdf, Construction=Rectangular, Created By="D. Gakure", Depth=0.5mm, Features="Moisture Resistant", Height=0.32mm, Lead Free="Lead Free", Length=1mm, Manufacturer Part Number=RC0402FR-071ML, Military Standard=Not, Number of Terminations=2, Packaging="Tape and Reel", Power Rating=63mW, Pricing 1="1=0.10000, 10=0.01600, 100=0.00640, 1000=0.00286, 2500=0.00248, 5000=0.00205 (USD)", Pricing 2="1=0.10000, 10=0.01200, 50=0.01200, 100=0.00400, 1000=0.00400, 10000=0.00300 (USD)", Pricing 3="10000=0.00290, 50000=0.00200 (GBP)", REACH SVHC=Unknown, RoHS=Yes, RoHS Compliant=Yes, Series=RC, Size Code=0402, Stock 1=7856490, Stock 2=1194490, Stock 3=1530000, Supplier 1=Digi-Key, Supplier 2=Mouser, Supplier 3=Farnell, Supplier Part Number 2=603-RC0402FR-071ML, Supplier Part Number 3=2421892, Technology="THICK FILM", Termination=SMD/SMT, Tolerance=1%
R8 R9: "RES SMD 30 OHM 1% 1/16W 0402", Case Code (Imperial)=0402, Case Code (Metric)=1005, Manufacturer=Yageo, Max Operating Temperature=155°C, Max Power Dissipation=63mW, Min Operating Temperature=-55°C, Resistance=30R, Resistance Tolerance=1%, Resistor Type="Thick Film", Supplier Part Number 1=311-30LRCT-ND, Temperature Coefficient=100ppm/°C, Voltage Rating=50V, Case/Package=0402, Category="Chip SMD Resistors", Checked By=?, ComponentLink1Description="Online datasheet", ComponentLink1URL=https://datasheet.ciiva.com/7849/1018594-7849958.pdf, Construction=Rectangular, Contact Plating=Tin,Matte, Created By="D. Gakure", Depth=0.5mm, Features="Moisture Resistant", Height=0.35mm, Lead Free="Lead Free", Length=1mm, Manufacturer Part Number=RC0402FR-0730RL, Military Standard=Not, Number of Terminations=2, Packaging="Tape and Reel", Power Rating=63mW, Pricing 1="1=0.10000, 10=0.01400, 100=0.00580, 1000=0.00260, 2500=0.00226, 5000=0.00186 (USD)", Pricing 2="1=0.10000, 10=0.01200, 50=0.01200, 100=0.00400, 1000=0.00400, 10000=0.00300 (USD)", Pricing 3="10=0.01210, 100=0.00420, 500=0.00370, 2500=0.00280, 5000=0.00250, 10000=0.00230, 50000=0.00150 (GBP)", REACH SVHC=Unknown, RoHS=Yes, RoHS Compliant=Yes, Series=RC, Size Code=0402, Stock 1=2973, Stock 2=41804, Stock 3=4422, Supplier 1=Digi-Key, Supplier 2=Mouser, Supplier 3=Farnell, Supplier Part Number 2=603-RC0402FR-0730RL, Supplier Part Number 3=1458775, Termination=SMD/SMT, Tolerance=1%, Voltage Rating (DC)=50V, Width=0.5mm
R10 R13 R15: "RES SMD 150 OHM 1% 1/16W 0402", Case Code (Imperial)=0402, Case Code (Metric)=1005, Manufacturer=Yageo, Max Operating Temperature=155°C, Max Power Dissipation=63mW, Min Operating Temperature=-55°C, Package Quantity=1, Power Rating=62.5mW, Resistance=150R, Resistance Tolerance=1%, Resistor Type="Thick Film", Supplier Part Number 1=311-150LRCT-ND, Temperature Coefficient=100ppm/°C, Voltage Rating=50V, Case/Package=0402, Category="Chip SMD Resistors", Checked By=?, ComponentLink1Description="ine datasheet", ComponentLink1URL=https://datasheet.ciiva.com/11808/0900766b80c66297-11808422.pdf, Construction=Rectangular, Created By="D. Gakure", Depth=0.5mm, Features="Moisture Resistant", Height=0.016inch, Lead Free="Lead Free", Length=1mm, Manufacturer Part Number=RC0402FR-07150RL, Military Standard=Not, Number of Terminations=2, Packaging="Tape and Reel", Pricing 1="1=0.10000, 10=0.01400, 100=0.00580, 1000=0.00260, 2500=0.00226, 5000=0.00186 (USD)", Pricing 2="1=0.10000, 10=0.01200, 50=0.01200, 100=0.00400, 1000=0.00400, 10000=0.00300 (USD)", Pricing 3="10000=0.00270, 50000=0.00200 (GBP)", REACH SVHC="No SVHC", RoHS=Yes, RoHS Compliant=Yes, Series=RC, Stock 1=5214533, Stock 2=582717, Stock 3=880000, Supplier 1=Digi-Key, Supplier 2=Mouser, Supplier 3=Farnell, Supplier Part Number 2=603-RC0402FR-07150RL, Supplier Part Number 3=2421893, Technology="THICK FILM", Termination=SMD/SMT, Tolerance=1%, Width=0.02inch, Working Voltage=50V
R14: "RES SMD 220 OHM 1% 1/16W 0402", Case Code (Imperial)=0402, Case Code (Metric)=1005, Manufacturer=Yageo, Max Operating Temperature=155°C, Max Power Dissipation=63mW, Min Operating Temperature=-55°C, Package Quantity=1, Power Rating=62.5mW, Resistance=220R, Resistor Type="Thick Film", Supplier Part Number 1=311-220LRCT-ND, Temperature Coefficient=100ppm/°C, Tolerance=1%, Voltage Rating=50V, Case/Package=0402, Category=Resistors, Checked=?, ComponentLink1Description="Online datasheet", ComponentLink1URL=https://datasheet.ciiva.com/11819/0900766b80c66297-11819466.pdf, Created=D.G, Depth=0.5mm, Features="Moisture Resistant", Height=0.016inch, Lead Free="Lead Free", Length=1mm, Manufacturer Part Number=RC0402FR-07220RL, Military Standard=Not, Number of Pins=2, Number of Terminations=2, Packaging="Tape and Reel", Pricing 1="1=0.10000, 10=0.01400, 100=0.00580, 1000=0.00262, 2500=0.00228, 5000=0.00188 (USD)", Pricing 2="1=0.10000, 10=0.01200, 100=0.00400, 1000=0.00400, 2500=0.00400, 10000=0.00300 (USD)", Pricing 3="1=0.08130, 25=0.01210, 100=0.01120, 250=0.01030, 500=0.00900 (GBP)", REACH SVHC="No SVHC", RoHS=Yes, Stock 1=1286042, Stock 2=324625, Stock 3=18234, Supplier 1=Digi-Key, Supplier 2=Mouser, Supplier 3=Farnell, Supplier Part Number 2=603-RC0402FR-07220RL, Supplier Part Number 3=2147864, Termination=SMD/SMT, Voltage Rating (DC)=50V, Width=0.02inch
SW1: "SWITCH TACTILE SSPST 50mA @ 12VDC", Current Rating="50 mA", Manufacturer=USAKRO, Operating Force="3.9 N", Supplier 1 Part Number=C493283, Voltage Rating DC="12 VDC", Actuator=Oval, ComponentLink1Description="Online datasheet", ComponentLink1URL=https://datasheet.ciiva.com/18514/pts810-4mar13-18514167.pdf, Contact Form=SPST, Manufacturer Part Number=UK-B0267-SP25Y, Mounting Style=SMD/SMT, Product Category="Tactile Switches", RoHS=Details, Supplier 1=LCSC, Switch Function="OFF - (ON)"
U1: library part NCP114ASN330T1G, "ON SEMICONDUCTOR - NCP114ASN330T1G - LDO Voltage Regulator, Fixed, 1.7 V to 5.5 V in, 3.3 V/300 mA out, 150 mV drop, TSOP-5", Case/Package=SOT-23-5, Dropout Voltage=225mV, Manufacturer="ON Semiconductor", Max Input Voltage=5.5V, Max Operating Temperature=85°C, Min Operating Temperature=-40°C, Min Output Voltage=3.3V, Output Current=300mA, Power Supply Rejection Ratio (PSRR)=75dB, Quiescent Current=95uA, Supplier Part Number 1=NCP114ASN330T1GOSCT-ND, Category="Voltage Regulators - Linear", Checked=?, ComponentLink3Description="On Semi datasheet online", ComponentLink3URL=http://www.onsemi.com/pub/Collateral/NCP114-D.PDF, Created=DG, Lead Free="Lead Free", Manufacturer Part Number=NCP114ASN330T1G, Mount="Surface Mount", Number of Regulators=1, Output Configuration=Positive, Output Type=Fixed, Packaging="Cut Tape", Pricing 1="1=0.33000, 10=0.24900, 25=0.21760, 100=0.12440, 250=0.11664, 500=0.09330, 1000=0.07153 (USD)", RoHS=No, Stock 1=32529, Supplier 1=Digi-Key, Supplier 2=RSComponents, Supplier 3=Mouser, Supplier Part Number 2=1263178, Supplier Part Number 3=863-NCP114ASN330T1G
U2: "POWER LOAD SWITCH, HIGH SIDE, SOT-23-6; Power Load Switch Type:High Side; Input Voltage:6.5V; Current Limit:1.7A; On State Resistance:0.085ohm; Distribution Switch Case Style:SOT-23; No. of Pins:6; Thermal Protection:Yes; On / Enable;RoHS Compliant: Yes", Case/Package=SOT-23, Manufacturer 1="Texas Instruments", Max Input Voltage=6.5V, Max Operating Temperature=85°C, Max Power Dissipation=625mW, Min Input Voltage=2.5V, Min Operating Temperature=-40°C, On-State Resistance=85mR, Output Current=1.5A, Package Quantity=1, Supplier Part Number 1=296-32464-1-ND, Category="Hot Swap Controllers", ComponentLink1Description=https://datasheet.ciiva.com/15108/getdatasheetpartid-297517-15108509.pdf?src-supplier=Verical, ComponentLink1URL=https://datasheet.ciiva.com/15108/getdatasheetpartid-297517-15108509.pdf?src-supplier=Verical, Lead Free="Lead Free", Manufacturer Part Number 1=TPS2553DBVR, Max Supply Voltage=6.5V, Min Supply Voltage=2.5V, Number of Outputs=1, Number of Pins=6, Packaging="Tape and Reel", Pricing 1="1=1.20000, 10=1.07100, 25=1.01640, 100=0.78050, 250=0.68972, 500=0.65340, 1000=0.50820 (USD)", Radiation Hardening=No, REACH SVHC="No SVHC", RoHS=Yes, Stock 1=14713, Supplier 1=Digi-Key, Supplier 2=Farnell, Supplier 3=Mouser, Supplier Part Number 2=3124082, Supplier Part Number 3=595-TPS2553DBVR, Weight=0.00127oz
U3: "ARM Cortex M4 MCU+FPU 512k Flash, 128k RAM, 100MHz, QFPN48", Case/Package=UFQFPN, Frequency=100MHz, Manufacturer=STMicroelectronics, Manufacturer Part Number=STM32F411CEU6, Max Operating Temperature=85°C, Max Power Dissipation=625mW, Max Supply Voltage=3.6V, Min Operating Temperature=-40°C, Min Supply Voltage=1.7V, Operating Supply Voltage=3.3V, Package Quantity=1560, Supplier Part Number 1=497-14907-ND, ComponentLink1Description="ST datasheet", ComponentLink1URL=https://www.st.com/resource/en/datasheet/stm32f411vc.pdf, Core Architecture=ARM, Data Bus Width=32b, Interface=I2C,I2S,IrDA,LIN,MMC,SD,SDIO,SPI,UART,USART,USB, Lead Free="Lead Free", Length=7mm, Max Frequency=100MHz, Memory Size=512KB, Memory Type=FLASH, Mount="Surface Mount", Number of ADC Channels=16, Number of I/Os=36, Number of Pins=48, Number of Programmable I/O=36, Number of Timers/Counters=8, Oscillator Type=Internal, Packaging=Tray, Peripherals="Brown-out Detect/Reset,DMA,POR,PWM,WDT", Pricing 1="1=6.25, 10=5.65, 260=4.46708, 520=4.07294, 1040=3.54739 (USD)", Radiation Hardening=No, RAM Size=128KB, REACH SVHC="No SVHC", Stock 1=16657, Supplier 1=Digi-Key, Supplier 2=Farnell, Supplier 3=Mouser, Supplier 4=RSComponents, Supplier Part Number 2=2456965, Supplier Part Number 3=511-STM32F411CEU6, Supplier Part Number 4=1106616, Watchdog Timer=Yes, Width=7mm
X1: "24MHz ±10ppm 12pF 40Ω SMD-3225_4P SMD Crystal Resonators RoHS", Frequency=24MHz, Loading capacitance=12pF, Manufacturer=JWT, Supplier 1 Part Number=C709021, Tolerance=±10ppm, ComponentLink1Description="Online datasheet", ComponentLink1URL=https://datasheet.lcsc.com/szlcsc/2008211534_JWT-CF4024M00012T8188046_C709021.pdf, ESR=40R, Manufacturer Part Number=CF4024M00012T8188046, Suplier 1=LCSC

## Via types
v1: diameter 0.6, hole 0.3, Top Layer to Bottom Layer, tented both sides, 37 vias

## Nets (pads, with @x,y where several pads share a name; then routed paths per layer and width w, separated by ;. In a path a pad name is that pad's centre, name@x,y a point inside that pad or via, vN(x,y) a via of type N, cw(c..) or ccw(c..) an arc to the next point about the centre after c; other vN are vias at no path point)
3V3: C2.2 C7.2 C8.2 C9.2 C10.2 D4.1 D7.2 J1.1 R1.1 R7.1 R15.2 U1.5 U3.1 U3.9 U3.24 U3.36 U3.48 | length 58.4
  Top Layer w0.3: U3.9 1.25,-2.3 1.325,-2.375 1.325,-2.759 1.953,-3.387 C9.2
  Top Layer w0.5: C2.2 -7.9,6.175 -7.755,6.32 -6.605,6.32 U1.5 ; U1.5@-6.585,6.34 -6.535,6.29 -5.724,6.29 -4.389,4.955 -3.15,4.955 -3.15,5.4 -3.025,5.525 C7.2 ; J1.1 -4.528,3.997 -4.528,5.095 ; C8.2@-4.389,-2.348 -4.389,-4.011 -4.025,-4.375 D7.2 -3.725,-4.375 -2.794,-5.306 -2.794,-7.425 -2.501,-7.718 -0.907,-7.718 -0.55,-8.075 D4.1 ; C8.2@-4.364,-2.348 -2.998,-2.348 U3.1@-2.85,-2.2 ; U3.48@-3.281,-1.677 -3.281,-1.709 U3.1@-2.85,-2.14 ; -3.25,5.036 U3.36@-2.814,4.6 ; C9.2 1.953,-3.437 2.572,-4.056 3.047,-4.056 v1(3.066,-4.075) ; v1(2.453,6.025) 2.465,6.038 3.275,6.038 R1.1 ; U3.24@3.375,4.025 3.8,4.45 4.1,4.45 ; v1(4.103,4.875) 4.1,4.872 4.1,4.45 ; C10.2@4.4,4.45 4.1,4.45 ; C10.2 4.829,4.45 5.308,3.971 5.308,3.63 v1(5.327,3.611) ; v1@5.375,3.495 5.55,3.32 R7.1 ; v1(7.294,0.841) 7.313,0.821 7.313,0.512 7.7,0.125 R15.2
  Bottom Layer w0.5: v1@-4.392,-3.132 -5.475,-2.049 J1.1 -2.796,3.05 -1.821,4.025 0.453,4.025 v1(2.453,6.025) 2.953,6.025 v1@4.084,4.894 ; v1(3.066,-4.075) 4.032,-3.109 4.032,2.316 v1(5.327,3.611) 6.25,2.687 6.25,1.635 6.543,1.342 6.765,1.342 7.267,0.841 v1(7.294,0.841)
  other v1: -4.375,-3.15
\I\L\I\M\_\E\N\A\B\L\E\: Q1.1 R7.2 U3.31 | length 9
  Top Layer w0.25: U3.31 -0.25,5.122 0.053,5.425 4.875,5.425 6.05,4.25 6.05,3.95 6.525,3.475 6.525,3.05 R7.2@6.65,2.925
\I\L\I\M\_\F\A\U\L\T\: R13.1 U3.11 | length 18
  Top Layer w0.25: U3.11 2.275,-2.2 2.275,-2.521 2.599,-2.845 v1(2.599,-2.94)
  Bottom Layer w0.25: v1(0.2,6.27) 1.03,7.1 5.159,7.1 5.606,6.653 5.606,4.668 2.272,1.333 2.272,-2.613 v1(2.599,-2.94)
CC1: J2.A5 R4.1 U3.14 | length 24.8